# Altium PCB BluePhil.PcbDoc
Units mm, origin at the board's own origin, x right, y up, seen from the top; angles counter-clockwise.
Board outline 46.95 x 28.9 mm, 4 copper layers (Top Layer, Int1 (GND), Int2 (PWR), Bottom Layer), stack 1.369 mm thick; 51 components, 50 nets, 198 pads, 170 vias.
Unrouted connection lines stored in the file: 5.
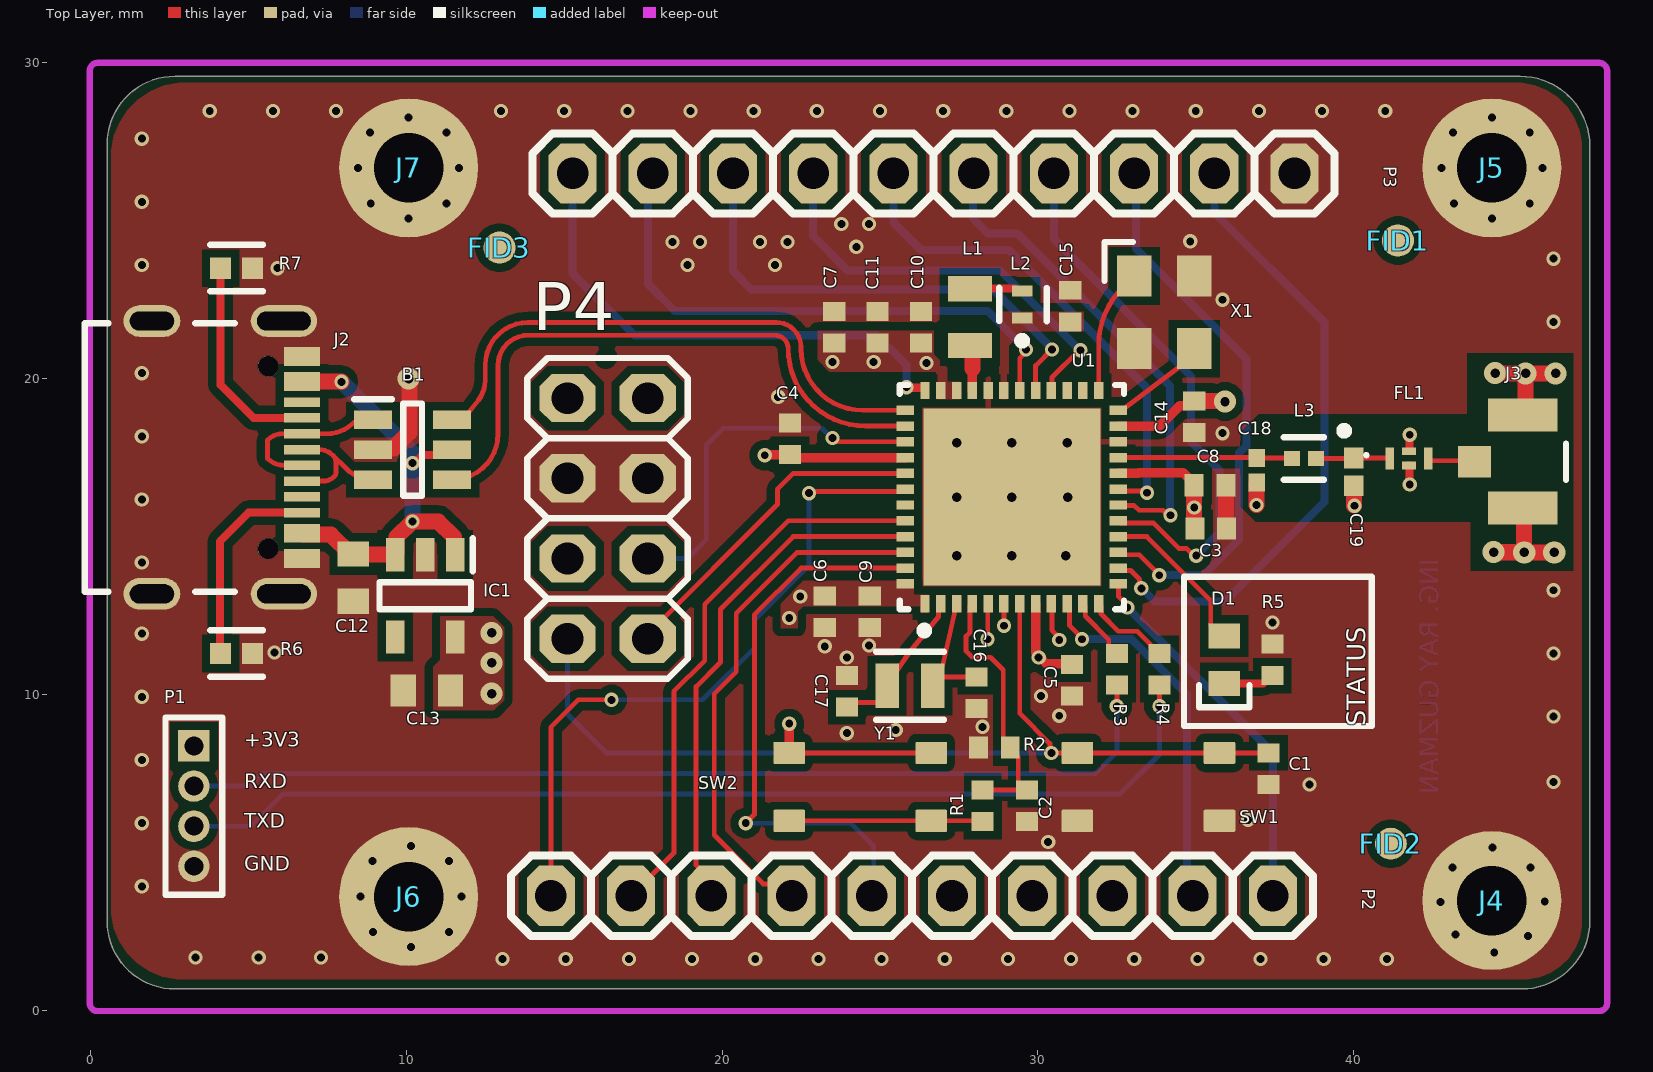
[diagram p0: Top Layer view]
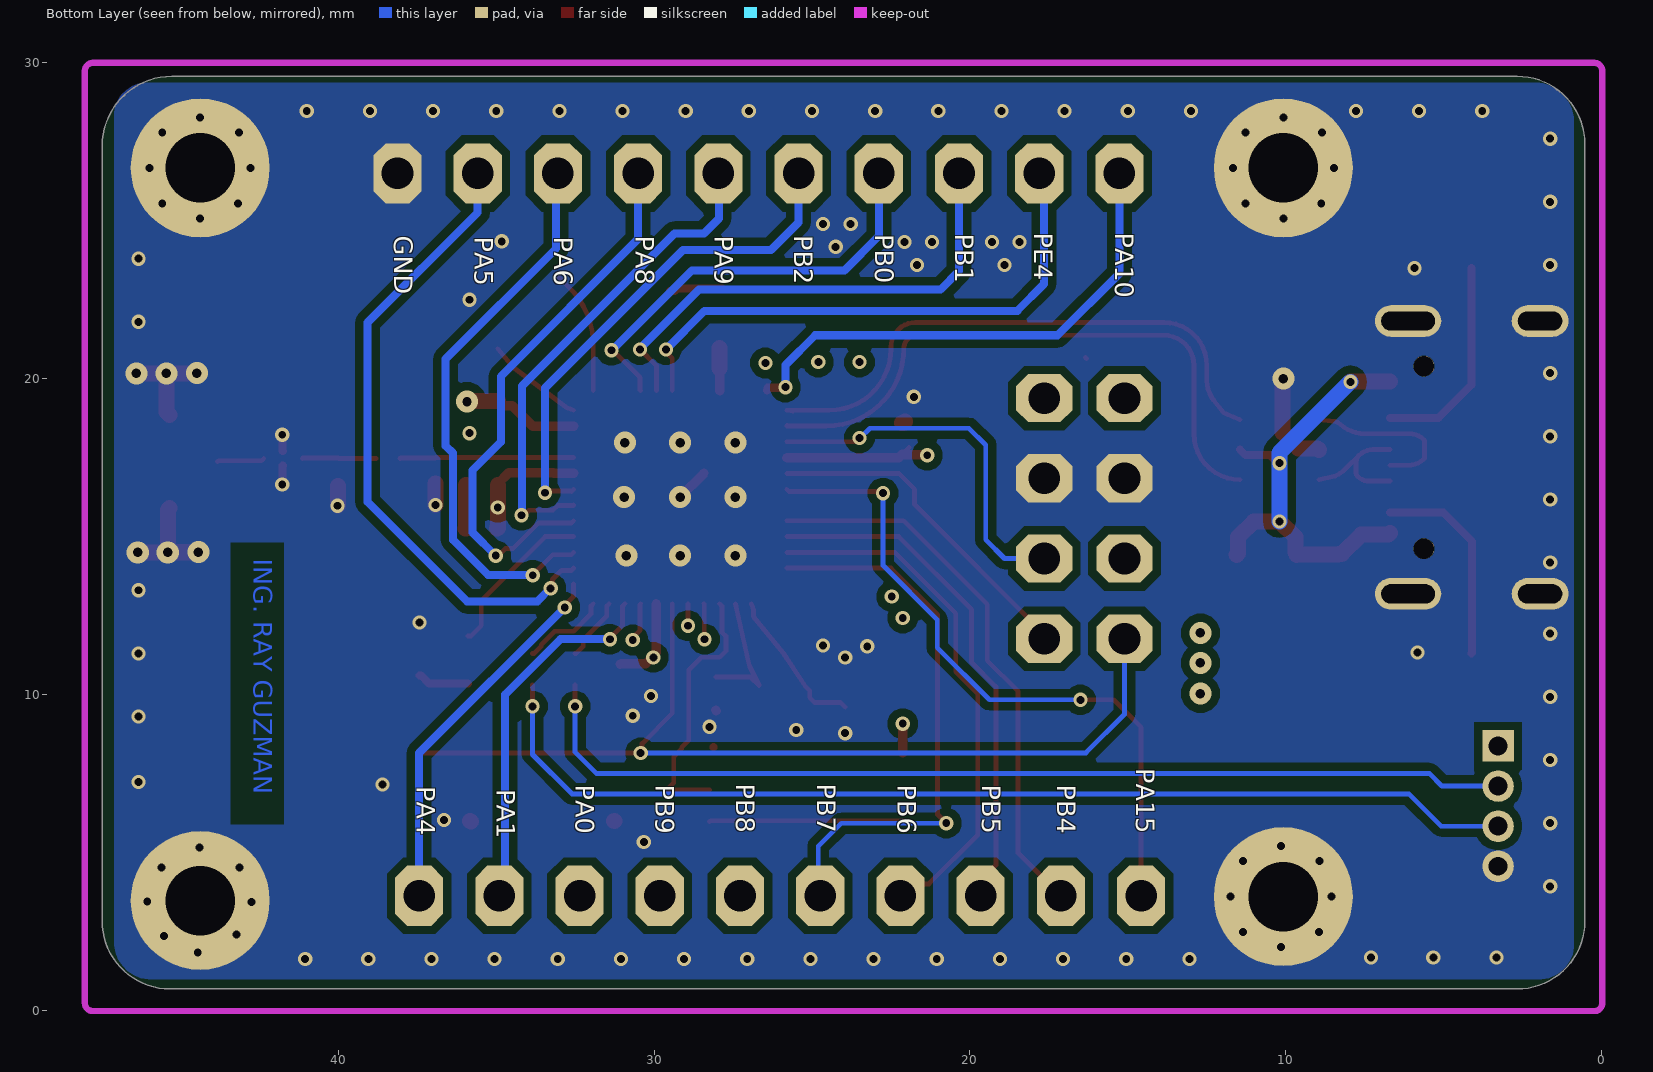
[diagram p1: Bottom Layer view, seen from below]
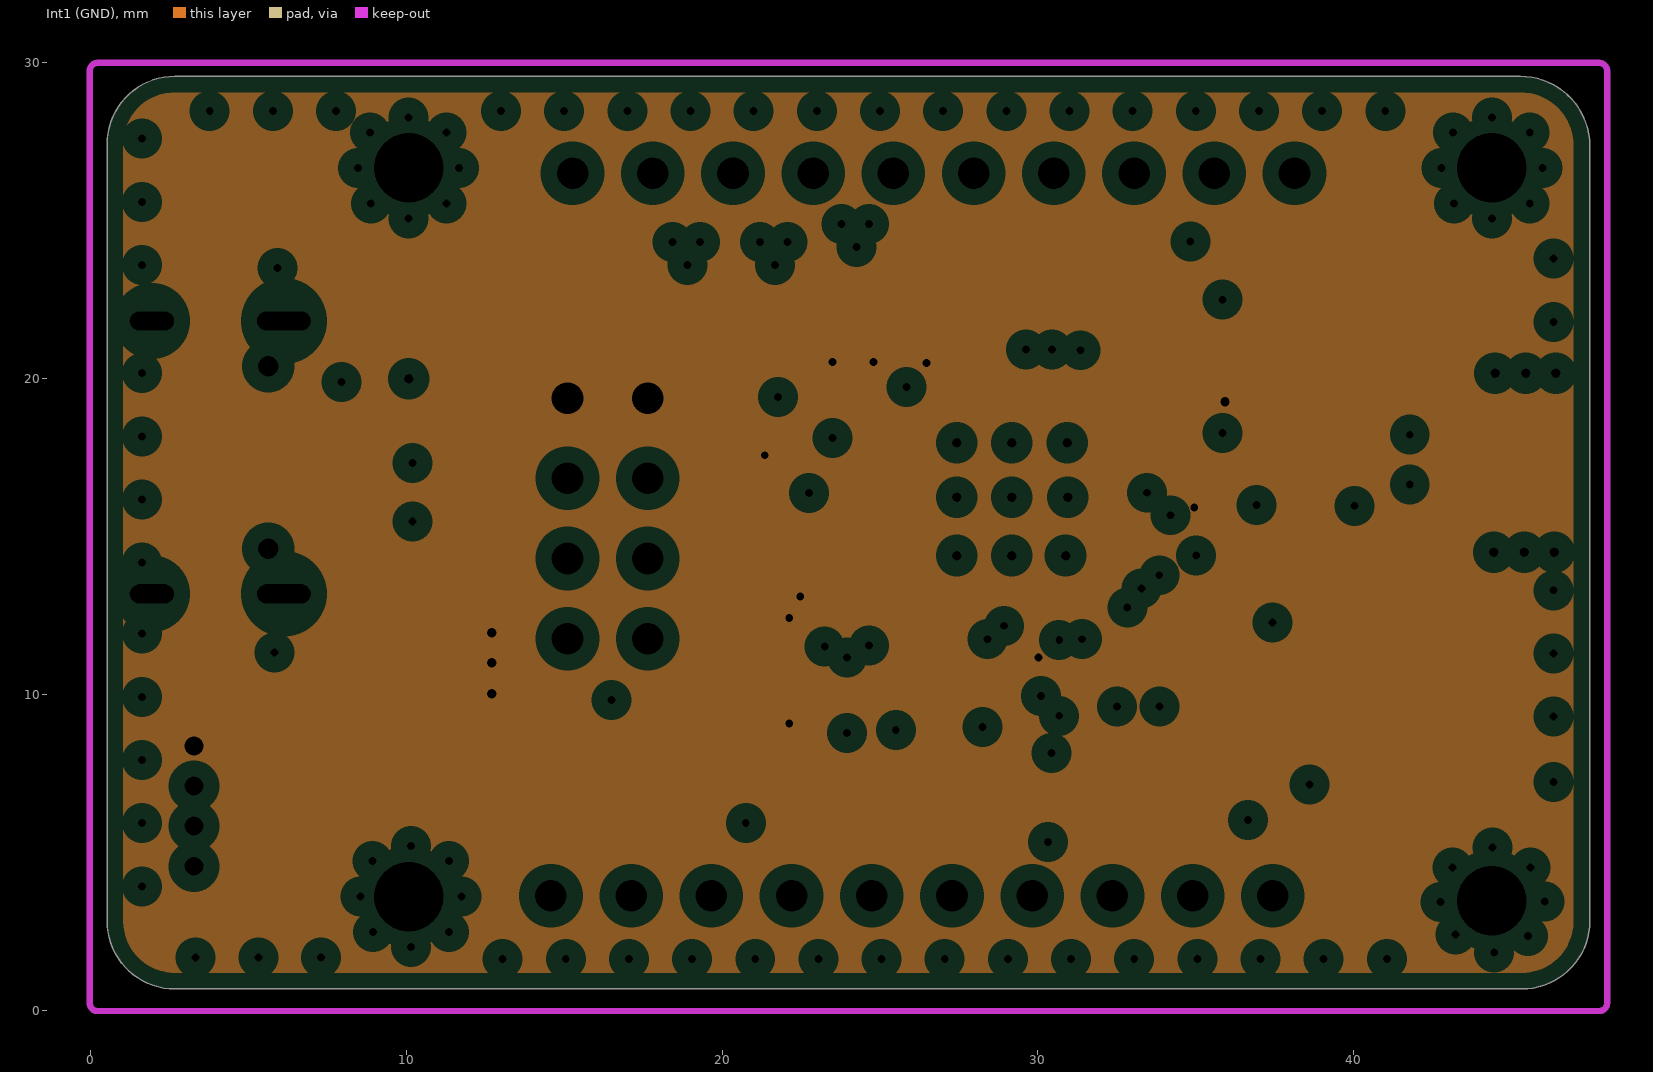
[diagram p2: Int1 (GND), clearances drawn from the general rule]
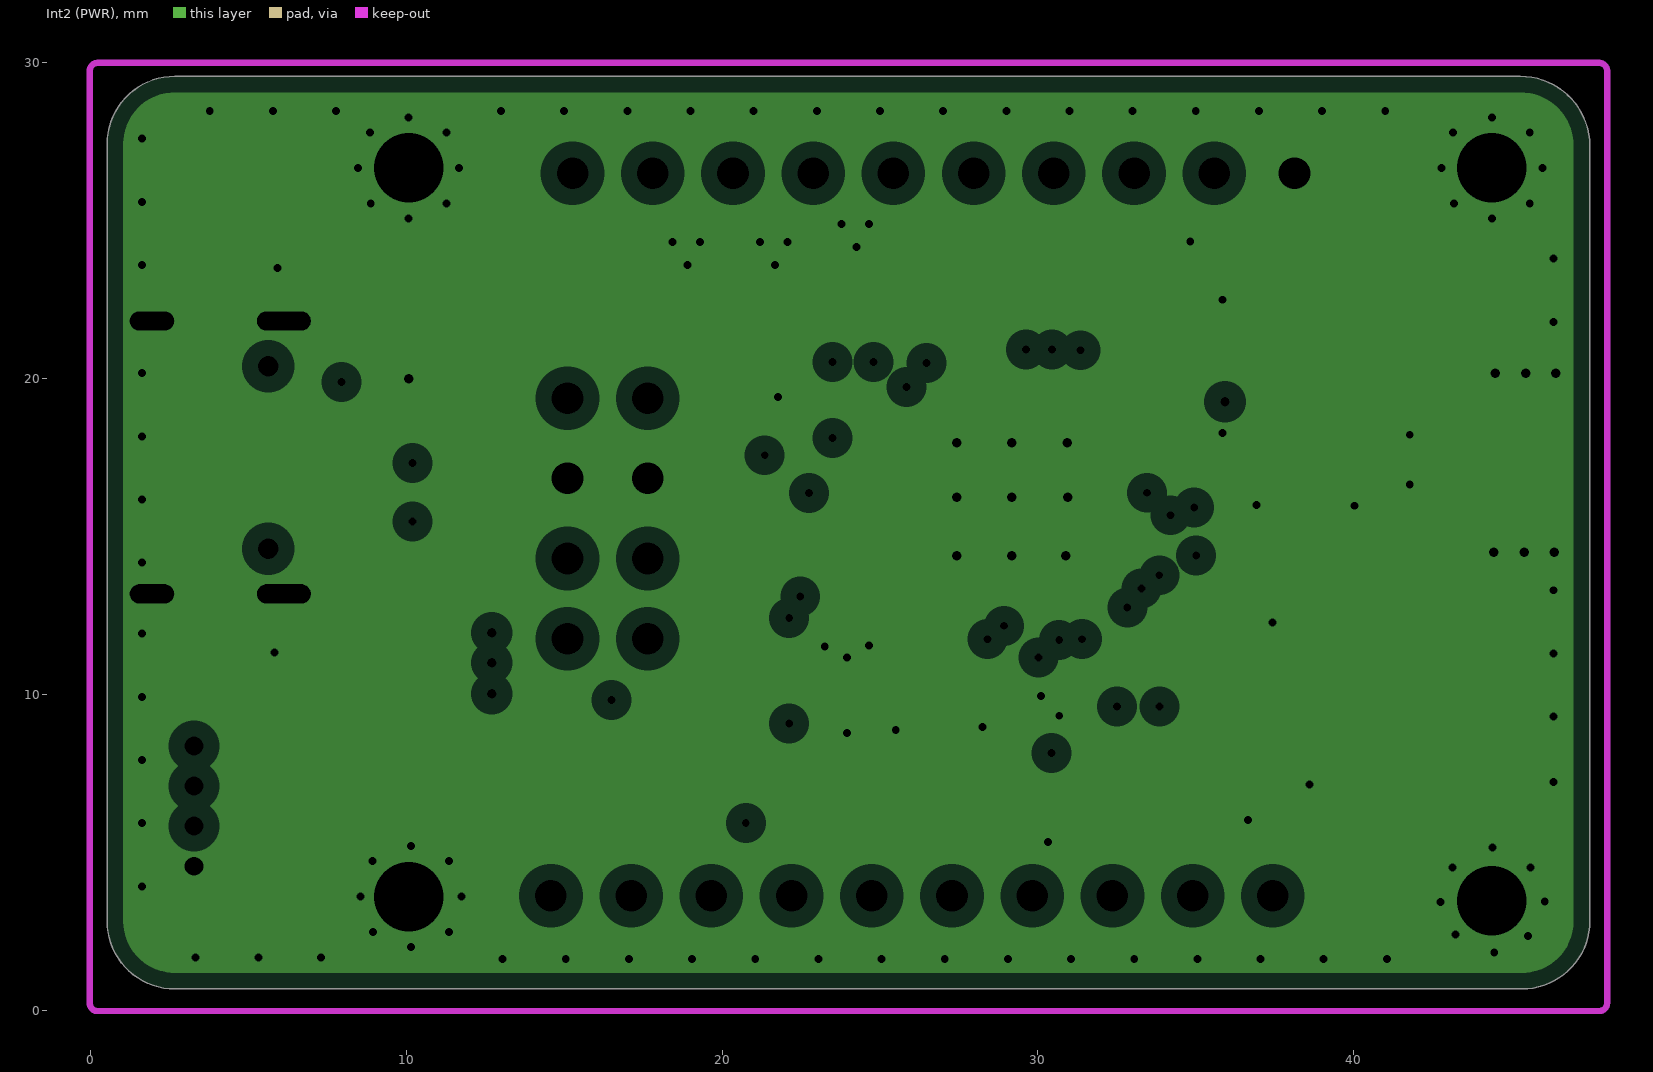
[diagram p3: Int2 (PWR), clearances drawn from the general rule]

## Layer stack, top to bottom
Top Solder: solder mask 0.0254, SM-001, Dk 4
Top Layer: signal copper 0.035
Dielectric 1: prepreg 0.1295, PP-017, Dk 4.3
Dielectric 2: prepreg 0.1295, PP-017, Dk 4.3
Int1 (GND): plane copper 0.035, net GND
Dielectric 3: core 0.7112, Core-039, Dk 4.8
Int2 (PWR): plane copper 0.035, net +3V3
Dielectric 4: prepreg 0.1295, PP-017, Dk 4.3
Dielectric 5: prepreg 0.1295, PP-017, Dk 4.3
Bottom Layer: signal copper 0.035
Bottom Solder: solder mask 0.0254, SM-001, Dk 4

## Board outline
0.525,2.825 0.525,27.425 cw(c2.675,27.425) 2.675,29.575 45.275,29.575 cw(c45.275,27.375) 47.475,27.375 47.475,2.825 cw(c45.325,2.825) 45.325,0.675 2.675,0.675 cw(c2.675,2.825)

## Design rules (kind name [scope] priority, off if disabled: settings)
Clearance Clearance_2 [OnMid vs OnMid] p1: gap=0.254 ignorepadtopadclearanceinfootprint=TRUE except(0: Arc-Hole Track-Hole SMDPad-Hole THPad-Hole Via-Hole Fill-Hole Poly-Hole Region-Hole Text-Hole)
Clearance [All] p2: gap=0.254 ignorepadtopadclearanceinfootprint=TRUE except(0: Arc-Hole Track-Hole SMDPad-Hole THPad-Hole Via-Hole Fill-Hole Poly-Hole Region-Hole Text-Hole; 0.15: Track-Track SMDPad-Via; 0.2: Track-SMDPad Track-Via SMDPad-Poly Via-Via)
Clearance Clearance_9_1 [(ExistsOnLayer('GND')) vs (ExistsOnLayer('GND'))] p3: gap=0.254 ignorepadtopadclearanceinfootprint=FALSE except(0: Arc-Hole Track-Hole SMDPad-Hole THPad-Hole Via-Hole Fill-Hole Poly-Hole Region-Hole Text-Hole)
Clearance Clearance_9_2 [(ExistsOnLayer('Top Layer') Or ExistsOnLayer('Bottom Layer')) vs (ExistsOnLayer('Top Layer') Or ExistsOnLayer('Bottom Layer'))] p4: gap=0.254 ignorepadtopadclearanceinfootprint=FALSE except(0: Arc-Hole Track-Hole SMDPad-Hole THPad-Hole Via-Hole Fill-Hole Poly-Hole Region-Hole Text-Hole; 0.2: Via-Via)
Clearance Clearance_1 [(ExistsOnLayer('GND')) vs (ExistsOnLayer('GND'))] p5: gap=0.254 ignorepadtopadclearanceinfootprint=FALSE except(0: Arc-Hole Track-Hole SMDPad-Hole THPad-Hole Via-Hole Fill-Hole Poly-Hole Region-Hole Text-Hole)
Clearance Clearance_3 [(ExistsOnLayer('Top Layer') Or ExistsOnLayer('Bottom Layer')) vs (ExistsOnLayer('Top Layer') Or ExistsOnLayer('Bottom Layer'))] p6: gap=0.254 ignorepadtopadclearanceinfootprint=FALSE except(0: Arc-Hole Track-Hole SMDPad-Hole THPad-Hole Via-Hole Fill-Hole Poly-Hole Region-Hole Text-Hole)
Clearance Clearance_4 [(ExistsOnLayer('GND')) vs (ExistsOnLayer('GND'))] p7: gap=0.254 ignorepadtopadclearanceinfootprint=FALSE except(0: Arc-Hole Track-Hole SMDPad-Hole THPad-Hole Via-Hole Fill-Hole Poly-Hole Region-Hole Text-Hole)
Clearance Clearance_5 [(ExistsOnLayer('Top Layer') Or ExistsOnLayer('Bottom Layer')) vs (ExistsOnLayer('Top Layer') Or ExistsOnLayer('Bottom Layer'))] p8: gap=0.254 ignorepadtopadclearanceinfootprint=FALSE except(0: Arc-Hole Track-Hole SMDPad-Hole THPad-Hole Via-Hole Fill-Hole Poly-Hole Region-Hole Text-Hole)
Clearance Clearance_6 [(ExistsOnLayer('GND')) vs (ExistsOnLayer('GND'))] p9: gap=0.254 ignorepadtopadclearanceinfootprint=FALSE except(0: Arc-Hole Track-Hole SMDPad-Hole THPad-Hole Via-Hole Fill-Hole Poly-Hole Region-Hole Text-Hole)
Clearance Clearance_7 [(ExistsOnLayer('Top Layer') Or ExistsOnLayer('Bottom Layer')) vs (ExistsOnLayer('Top Layer') Or ExistsOnLayer('Bottom Layer'))] p10: gap=0.254 ignorepadtopadclearanceinfootprint=FALSE except(0: Arc-Hole Track-Hole SMDPad-Hole THPad-Hole Via-Hole Fill-Hole Poly-Hole Region-Hole Text-Hole)
Clearance Clearance_8 [(ExistsOnLayer('GND')) vs (ExistsOnLayer('GND'))] p11: gap=0.254 ignorepadtopadclearanceinfootprint=FALSE except(0: Arc-Hole Track-Hole SMDPad-Hole THPad-Hole Via-Hole Fill-Hole Poly-Hole Region-Hole Text-Hole)
Clearance Clearance_9 [(ExistsOnLayer('Top Layer') Or ExistsOnLayer('Bottom Layer')) vs (ExistsOnLayer('Top Layer') Or ExistsOnLayer('Bottom Layer'))] p12: gap=0.254 ignorepadtopadclearanceinfootprint=FALSE except(0: Arc-Hole Track-Hole SMDPad-Hole THPad-Hole Via-Hole Fill-Hole Poly-Hole Region-Hole Text-Hole)
Clearance Clearance_10_1 [(ExistsOnLayer('GND')) vs (ExistsOnLayer('GND'))] p13: gap=0.254 ignorepadtopadclearanceinfootprint=FALSE except(0: Arc-Hole Track-Hole SMDPad-Hole THPad-Hole Via-Hole Fill-Hole Poly-Hole Region-Hole Text-Hole; 0.2: Via-Via)
Clearance Clearance_10_2 [(ExistsOnLayer('Top Layer') Or ExistsOnLayer('Bottom Layer')) vs (ExistsOnLayer('Top Layer') Or ExistsOnLayer('Bottom Layer'))] p14: gap=0.254 ignorepadtopadclearanceinfootprint=FALSE except(0: Arc-Hole Track-Hole SMDPad-Hole THPad-Hole Via-Hole Fill-Hole Poly-Hole Region-Hole Text-Hole; 0.2: Via-Via)
Clearance Clearance_10 [(ExistsOnLayer('GND')) vs (ExistsOnLayer('GND'))] p15: gap=0.254 ignorepadtopadclearanceinfootprint=FALSE except(0: Arc-Hole Track-Hole SMDPad-Hole THPad-Hole Via-Hole Fill-Hole Poly-Hole Region-Hole Text-Hole; 0.2: Via-Via)
Clearance Clearance_11 [(ExistsOnLayer('Top Layer') Or ExistsOnLayer('Bottom Layer')) vs (ExistsOnLayer('Top Layer') Or ExistsOnLayer('Bottom Layer'))] p16: gap=0.254 ignorepadtopadclearanceinfootprint=FALSE except(0: Arc-Hole Track-Hole SMDPad-Hole THPad-Hole Via-Hole Fill-Hole Poly-Hole Region-Hole Text-Hole; 0.2: Via-Via)
Clearance Clearance_12 [All] p17: gap=0.254 ignorepadtopadclearanceinfootprint=FALSE except(0: Arc-Hole Track-Hole SMDPad-Hole THPad-Hole Via-Hole Fill-Hole Poly-Hole Region-Hole Text-Hole)
Creepage Creepage_1 [All] p1: checkdistance=0.254 applytopolygonpour=TRUE
DiffPairsRouting [All] p1: maxlimit=0.254 minlimit=0.254 mostfreqgap=0.254 toplayer_minwidth=0.152 toplayer_maxwidth=254 toplayer_prefwidth=0.254 bottomlayer_minwidth=0.152 bottomlayer_maxwidth=254 bottomlayer_prefwidth=0.254 maxuncoupledlength=12.7
DiffPairsRouting DifferentialPairsRouting_1 [All] p2: maxlimit=0.15 minlimit=0.15 mostfreqgap=0.15 toplayer_minwidth=0.22 toplayer_maxwidth=0.22 toplayer_prefwidth=0.22 bottomlayer_minwidth=0.22 bottomlayer_maxwidth=0.22 bottomlayer_prefwidth=0.22 maxuncoupledlength=0.254
MinimumSolderMaskSliver [All] p1: minsoldermaskwidth=0.151
PlaneClearance [All] p1: clearance=0.508
PlaneConnect [All] p1: planeconnectstyle=Relief reliefexpansion=0.508 reliefentries=4 reliefconductorwidth=0.254 reliefairgap=0.254
PolygonConnect [All] p1: connectstyle=Direct reliefconductorwidth=0.254 reliefentries=4 polygonreliefangle="90 Angle" airgapwidth=0.254
RoutingVias [All] p1: holewidth=0.711 width=1.27 viastyle="Through Hole" minholewidth=0.711 minwidth=1.27 maxholewidth=0.711 maxwidth=1.27
RoutingVias RoutingViaStyle_1 [All] p2: holewidth=0.25 width=0.25 viastyle="Through Hole" minholewidth=0.2 minwidth=0.4 maxholewidth=0.5 maxwidth=0.1
SilkToSilkClearance [All] p1: silktosilkclearance=0.2
SolderMaskExpansion [All] p1: expansion=0.102 istentingtop=FALSE
UnRoutedNet BrokenNets_1 [All] p1: checkbadconnections=TRUE
Width [All] p1: maxlimit=1 minlimit=0.152 preferedwidth=0.254 minimp=50.000000 maximp=50.000000 favimp=50.000000
Width MaxMinWidth_1 [All] p2: maxlimit=1 minlimit=0.152 preferedwidth=0.254 minimp=50.000000 maximp=50.000000 favimp=50.000000
24 further rules are at their usual default settings.

## Classes and differential pairs
differential pair class USB: USB_D
net class USB: USB_D_N USB_D_P
differential pair USB_D: +USB_D_P -USB_D_N

## Components (designator, comment, footprint, x,y, rotation, side; value= is the part's Value field where it differs from the comment)
B1 "USBLC6-2SC6" SOT95P280X145-6N 10.2,17.75 r0 top locked
C1 "C0402_10V" CAP_0402 37.3,7.65 r270 top value=100nF
C2 "C0402_10V" CAP_0402 29.65,6.475 r270 top value=100nF
C3 "C0402_10V" CAP_0402 35.475,15.25 r0 top value=100nF
C4 "C0402_10V" CAP_0402 22.15,18.1 r90 top value=100nF
C5 "C0402_10V" CAP_0402 31.075,10.45 r270 top value=100nF
C6 "C0402_10V" CAP_0402 23.25,12.625 r270 top value=100nF
C7 "C0402_10V" CAP_0402 23.55,21.625 r90 top value=100nF
C8 "C0402_10V" CAP_0402 35.45,16.625 r0 top value=100nF
C9 "C0402_10V" CAP_0402 24.675,12.625 r270 top value=4.7uF
C10 "C0402_10V" CAP_0402 26.3,21.625 r90 top value=100nF
C11 "C0402_10V" CAP_0402 24.925,21.625 r90 top value=4.7uF
C12 "C0603_10V" CAP_0603 8.325,13.7 r90 top
C13 "C0603_10V" CAP_0603 10.65,10.125 r0 top
C14 "C0402_10V" CAP_0402 34.95,18.8 r270 top value=100nF
C15 "C0402_10V" CAP_0402 31.025,22.3 r90 top value=4.7uF
C16 "C0402_10V" CAP_0402 28.05,10.05 r90 top
C17 "C0402_10V" CAP_0402 23.95,10.1 r270 top
C18 "GRM1555C1HR80BA01D" CAPC1005X55X25LL05T10 36.925,17.1 r90 top
C19 "GRM1555C1HR30WA01D" CAPC1005X55X25NL05T10 40,17.05 r270 top
D1 "RED" LED_0603_RED 35.9,11.1 r90 top
FID1 "FID_1MM" FID_40X120D#1 41.4,24.125 r0 top locked
FID2 "FID_1MM" FID_40X120D#2 41.175,5.275 r90 top locked
FID3 "FID_1MM" FID_40X120D#2 12.95,24.15 r90 top
FL1 "DLF162500LT-5028A1" DLF162500LT5028A1 41.75,17.477 r0 top
IC1 "MIC5365-3.3YD5-TR" SOT95P280X100-5N 10.6,13.125 r270 top
J2 "USB4105-GF-A-060" USB4105-GF-A-060 4.322,17.506 r270 top locked
J3 "U.FL-R-SMT(10)" FP-U_FL-R-SMT_10-MFG 45.35,17.375 r90 top
J4 "4mmx1.5mm" PAD_WITH_HOLE_4mmx1.5mm#1 44.15,3.775 r0 top
J5 "4mmx1.5mm" PAD_WITH_HOLE_4mmx1.5mm#2 44.475,26.675 r0 top
J6 "4mmx1.5mm" PAD_WITH_HOLE_4mmx1.5mm#3 10.15,3.8 r0 top
J7 "4mmx1.5mm" PAD_WITH_HOLE_4mmx1.5mm#4 10.075,26.675 r0 top locked
L1 "74479774222" WE-PMI_0805_L2W1.2H0.5 27.85,21.95 r270 top
L2 "LQG15WZ10NJ02D" FP-LQG15WH_02-MFG 29.5,22.35 r90 top
L3 "LQG15HS2N7S02D" FP-LQG15HH_02-IPC_C 38.425,17.475 r180 top
P1 "MHDR1X4" MHDR1X4body 3.275,8.37 r270 top locked
P2 "Header 10" MY_MA10-1 26.01,3.625 r0 top
P3 "Header 10" MY_MA10-1 26.695,26.5 r0 top
P4 "Header 4X2" My_2X4 16.375,15.575 r90 top
R1 "220R" RES_0402 28.25,6.475 r270 top
R2 "5k1" RES_0402 28.625,8.325 r180 top
R3 "220R" RES_0402 32.5,10.8 r90 top
R4 "220R" RES_0402 33.85,10.8 r90 top
R5 "R0402" RES_0402 37.425,11.1 r270 top
R6 "ERJ-2RKF5101X" FP-ERJ2RK-IPC_A 4.625,11.3 r180 top locked
R7 "ERJ-2RKF5101X" FP-ERJ2RK-IPC_A 4.625,23.5 r180 top locked
SW1 "Tactile Switch" PTS815 33.5,7.075 r180 top
SW2 "Tactile Switch" PTS815 24.375,7.075 r180 top
U1 "STM32WB55CEU6" FP-UFQFPN48-A0B9-MFG 29.175,16.25 r90 top
X1 "24MHz" XTAL_3225 34,22.1 r270 top
Y1 "ABS06-107-32.768KHZ-T" FP-ABS06-MFG 25.95,10.275 r180 top

## Footprints (in the part's own frame and the unit in brackets; to place one, negate y for a bottom-side part, rotate by r counter-clockwise, add the part's x,y. Pads: shape width x height; smd on the part's side, far side on the other; paste and mask are expansions set on the pad)
CAP_0402 [mm]
  rect 0.6x0.7 smd: 1(-0.5,0) 2(0.5,0)
  body extent -0.5,-0.26 0.5,0.26, height 0.37
CAP_0603 [mm]
  rect 0.8x1 smd: 1(-0.75,0) 2(0.75,0)
  body extent -0.8,-0.4 0.8,0.4, height 0.51
CAPC1005X55X25LL05T10 [mm] "Chip Capacitor, 2-Leads, Body 1.00x0.50mm, IPC High Density"
  rect 0.56x0.52 smd: 1(-0.39,0) 2(0.39,0)
  body extent -0.53,-0.28 0.53,0.28, height 0.55
CAPC1005X55X25NL05T10 [mm] "Chip Capacitor, 2-Leads, Body 1.00x0.50mm, IPC Medium Density"
  rect 0.66x0.62 smd: 1(-0.44,0) 2(0.44,0)
  body extent -0.53,-0.28 0.53,0.27, height 0.55
DLF162500LT5028A1 [mm]
  rect 0.275x0.7 smd: 1(-0.612,0) 3(0.613,0)
  rect 0.45x0.245 smd: 2(0,-0.227) 4(0,0.227)
  silkscreen extent -1.4,0.05 -1.3,0.15, body extent -0.83,-0.42 0.83,0.42, height 0.26
FID_40X120D#1 [mil]
  round 40 smd paste-19.68 mask+0: 1(0,9.84)
FID_40X120D#2 [mil]
  round 40 smd paste-19.68 mask+0: 1(0,0)
FP-ABS06-MFG [mm]
  rect 0.75x1.4 smd paste+0 mask+0: 1(-0.725,0) 2(0.725,0)
  silkscreen extent -1.07,-1.07 1.07,1.07, body extent -1.2,-0.8 1.2,0.8, height 0.25
FP-ERJ2RK-IPC_A [mm]
  rect 0.668x0.672 smd paste+0 mask+0: 1(-0.502,0) 2(0.502,0)
  silkscreen extent -0.84,-0.74 0.84,0.74, body extent -1.04,-0.54 1.04,0.54, height 0.25
FP-LQG15HH_02-IPC_C [mm]
  rect 0.515x0.472 smd paste+0 mask+0: 1(-0.379,0) 2(0.379,0)
  silkscreen extent -1.4,-1 0.64,0.67, body extent -0.74,-0.38 0.74,0.38, height 0.25
FP-LQG15WH_02-MFG [mm]
  rect 0.35x0.65 smd paste+0 mask+0: 1(-0.425,0) 2(0.425,0)
  silkscreen extent -1.27,-0.78 0.53,0.73, body extent -0.7,-0.43 0.7,0.43, height 0.25
FP-U_FL-R-SMT_10-MFG [mm]
  rect 1x1.05 smd paste-1000 mask+0: 1(0,1.525)
  rect 1.05x2.2 smd paste-1000 mask+0: 2(-1.475,0) 3(1.475,0)
  silkscreen extent -0.58,-1.38 0.58,-1.38, body extent -2.1,-1.48 2.1,2.15, height 0.25
FP-UFQFPN48-A0B9-MFG [mm]
  rect 0.55x0.3 smd paste+0 mask+0: 1(-3.375,2.75) 2(-3.375,2.25) 3(-3.375,1.75) 4(-3.375,1.25) 5(-3.375,0.75) 6(-3.375,0.25) 7(-3.375,-0.25) 8(-3.375,-0.75) 9(-3.375,-1.25) 10(-3.375,-1.75) 11(-3.375,-2.25) 12(-3.375,-2.75) 25(3.375,-2.75) 26(3.375,-2.25) 27(3.375,-1.75) 28(3.375,-1.25) 29(3.375,-0.75) 30(3.375,-0.25) 31(3.375,0.25) 32(3.375,0.75) 33(3.375,1.25) 34(3.375,1.75) 35(3.375,2.25) 36(3.375,2.75)
  rect 0.3x0.55 smd paste+0 mask+0: 13(-2.75,-3.375) 14(-2.25,-3.375) 15(-1.75,-3.375) 16(-1.25,-3.375) 17(-0.75,-3.375) 18(-0.25,-3.375) 19(0.25,-3.375) 20(0.75,-3.375) 21(1.25,-3.375) 22(1.75,-3.375) 23(2.25,-3.375) 24(2.75,-3.375) 37(2.75,3.375) 38(2.25,3.375) 39(1.75,3.375) 40(1.25,3.375) 41(0.75,3.375) 42(0.25,3.375) 43(-0.25,3.375) 44(-0.75,3.375) 45(-1.25,3.375) 46(-1.75,3.375) 47(-2.25,3.375) 48(-2.75,3.375)
  rect 5.6x5.6 smd paste+0 mask+0: 49(0,0)
  silkscreen extent -4.35,-3.55 3.55,3.55, body extent -3.75,-3.75 3.75,3.75, height 0.25
LED_0603_RED [mm]
  rect 0.8x1 smd: A(0.75,0) K(-0.75,0)
  silkscreen extent -1.5,-0.8 -0.8,0.8, body extent -0.8,-0.4 0.8,0.4, height 0.6
MHDR1X4body [mm]
  rect 1x1 hole 0.6: 1(0,0)
  round 1 hole 0.6: 2(1.27,0) 3(2.54,0) 4(3.81,0)
  silkscreen extent -0.9,-0.9 4.71,0.9, body extent -0.66,-1.22 4.42,1.28, height 4.61
My_2X4 [mil]
  oct 60x70 hole 39.37: 1(-150,-50) 2(-150,50) 3(-50,-50) 4(-50,50) 5(50,-50) 6(50,50) 7(150,-50) 8(150,50)
  silkscreen extent -200,-100 200,100, body extent -200,-100 200,100, height 336
MY_MA10-1 [mm]
  oct 1.524x1.905 hole 1: 1(-11.43,0) 2(-8.89,0) 3(-6.35,0) 4(-3.81,0) 5(-1.27,0) 6(1.27,0) 7(3.81,0) 8(6.35,0) 9(8.89,0) 10(11.43,0)
  silkscreen extent -12.7,-1.27 12.7,1.27, body extent -12.6,-1.25 12.8,1.25, height 8.23
PAD_WITH_HOLE_4mmx1.5mm#1 [mm]
  round 4.4 hole 2.2 paste-2539.97 mask+0: 1(0.225,-0.3)
PAD_WITH_HOLE_4mmx1.5mm#2 [mm]
  round 4.4 hole 2.2 paste-2539.97 mask+0: 1(-0.1,0)
PAD_WITH_HOLE_4mmx1.5mm#3 [mm]
  round 4.4 hole 2.2 paste-2539.97 mask+0: 1(-0.075,-0.2)
PAD_WITH_HOLE_4mmx1.5mm#4 [mm]
  round 4.4 hole 2.2 paste-2539.97 mask+0: 1(0,0)
PTS815 [mm]
  rrect10% 1x0.7 smd mask+0: 1(-2.25,1.075) 1(2.25,1.075) 2(-2.25,-1.075) 2(2.25,-1.075)
  body extent -2.25,-1.6 2.25,1.6, height 2.5
RES_0402 [mm]
  rect 0.6x0.7 smd: 1(-0.5,0) 2(0.5,0)
  body extent -0.5,-0.25 0.5,0.25, height 0.3
SOT95P280X100-5N [mm]
  rect 1.05x0.6 smd: 1(-1.3,0.95) 2(-1.3,0) 3(-1.3,-0.95) 4(1.3,-0.95) 5(1.3,0.95)
  silkscreen extent -1.83,-1.45 0.43,1.5, body extent -1.4,-1.45 1.4,1.45, height 1
SOT95P280X145-6N [mm]
  rect 1.2x0.6 smd: 1(-1.25,0.95) 2(-1.25,0) 3(-1.25,-0.95) 4(1.25,-0.95) 5(1.25,0) 6(1.25,0.95)
  silkscreen extent -1.85,-1.46 0.3,1.6
USB4105-GF-A-060 [mm]
  rect 0.6x1.15 smd mask+0.05: A1B12(-3.2,2.378) A4B9(-2.4,2.378) B1A12(3.2,2.378) B4A9(2.4,2.378)
  rect 0.3x1.15 smd mask+0.05: A5(-1.25,2.378) A6(-0.25,2.378) A7(0.25,2.378) A8(1.25,2.378) B5(1.75,2.378) B6(0.75,2.378) B7(-0.75,2.378) B8(-1.75,2.378)
  round 0.65 hole 0.65 unplated mask+0.05: MH(-2.89,1.303) MH(2.89,1.303)
  oval 1x2.1 hole 0.6 slot 1.7 at 90 deg: SH(-4.32,1.803) SH(4.32,1.803)
  oval 1x1.8 hole 0.6 slot 1.4 at 90 deg: SH(-4.32,-2.377) SH(4.32,-2.377)
  silkscreen extent -4.25,-4.5 4.25,0.25, body extent -4.47,-4.97 4.47,2.73, height 3.27
WE-PMI_0805_L2W1.2H0.5 [mm] "Power Multilayer Inductor, body 2x1.25mm"
  rect 0.8x1.4 smd: 1(-0.9,0) 2(0.9,0)
  body extent -1,-0.62 1,0.63, height 0.5
XTAL_3225 [mm]
  rect 1.3x1.1 smd: 1(-1.15,-0.95) 2(1.15,-0.95) 3(1.15,0.95) 4(-1.15,0.95)
  silkscreen extent -2.23,-1.89 -1,-1, body extent -1.6,-1.28 1.6,1.23, height 0.61

## Part data
B1: "TVS Diode Array Uni-Directional USBLC6-2SC6 17V, SOT-23 6-Pin", Manufacturer_Name=STMicroelectronics, Mouser Part Number=511-USBLC6-2SC6, Datasheet Link=http://www.st.com/st-web-ui/static/active/en/resource/technical/document/datasheet/CD00050750.pdf, Geometry.Height=1.45mm, Manufacturer_Part_Number=USBLC6-2SC6, Mouser Price/Stock=https://www.mouser.co.uk/ProductDetail/STMicroelectronics/USBLC6-2SC6?qs=po45yt2pPpu%2FhNIlwQdTlg%3D%3D
C1 C2 C3 C4 C5 C6 C7 C8 C9 C10 C11 C14 C15 C16 C17: library part CAP_0402_10V, "Capacitor SMD 0402 10V"
C12 C13: library part CAP_0603_10V, "Capacitor SMD 0603 10V"
C18: library part CMP-1034-00043-2, Manufacturer=Murata, Part Number=GRM1555C1HR80BA01D
C19: library part CMP-1034-00007-2, Manufacturer=Murata, Part Number=GRM1555C1HR30WA01D
D1: library part LED_0603_RED, "LED 0603 RED SMD"
FL1: "Filter", Manufacturer_Name=TDK, Mouser Part Number=810-DLF16250LT5028A1, Arrow Part Number=DLF162500LT-5028A1, Arrow Price/Stock=https://www.arrow.com/en/products/dlf162500lt-5028a1/tdk?region=europe, Datasheet Link=https://product.tdk.com/system/files/dam/doc/product/rf/rf/filter/catalog/rf_lpf_dlf162500lt-5028a1_en.pdf, Height=0.4mm, Manufacturer_Part_Number=DLF162500LT-5028A1, Mouser Price/Stock=https://www.mouser.co.uk/ProductDetail/TDK/DLF162500LT-5028A1?qs=U%2FZX79kHR%2FlwIbAISCs3qA%3D%3D
IC1: "Integrated Circuit", Manufacturer_Name=Microchip, Mouser Part Number=998-MIC5365-3.3YD5TR, Arrow Part Number=MIC5365-3.3YD5-TR, Arrow Price/Stock=https://www.arrow.com/en/products/mic5365-3.3yd5-tr/microchip-technology?region=nac, Datasheet Link=https://ww1.microchip.com/downloads/en/DeviceDoc/mic5365.pdf, Height=1mm, Manufacturer_Part_Number=MIC5365-3.3YD5-TR, Mouser Price/Stock=https://www.mouser.co.uk/ProductDetail/Microchip-Technology/MIC5365-3.3YD5-TR?qs=U6T8BxXiZAXzRinbbfZRrg%3D%3D
J2: "USB Connector Type C SMT 12 Pin", Manufacturer=GCT, Manufacturer Part Number=USB4105-GF-A-060
J3: library part CMP-0029-00003-2, "CONN U.FL RCPT STR 50 OHM SMD", Case/Package=SMD/SMT, Dielectric Material=Polymer, Frequency=6GHz, Housing Color=Beige, Max Operating Temperature=90°C, Min Operating Temperature=-40°C, Package Quantity=1, Body Material=Bronze, Body Plating=Silver, Connector Type=Coaxial, Contact Material=Brass, Contact Plating=Gold, Depth=3.1mm, Fastening Type=Snap, Impedance=50R, Lead Free="Lead Free", Length=3mm, Max Frequency=6GHz, Mount="Surface Mount", Orientation=Vertical, Packaging="Tape and Reel", Plating=Silver, Radiation Hardening=No, Termination=Solder
J4 J5 J6 J7: library part PAD_WITH_HOLE_4mmx1.5mm
L1: library part CMP-1392-00044-3, Ambient Temperature Range High=85°C, Ambient Temperature Range Low=-40°C, Case/Package=0805, Current Rating=700mA, DC Resistance (DCR)=340mΩ, Inductance=2.2µH, Inductance Tolerance=20%, Max Operating Temperature=125°C, Saturation Current=250mA, Self Resonant Frequency=40MHz, Series Resistance=425mΩ, Test Frequency=1MHz, Height=500µm, Length=2mm, Min Operating Temperature=-40°C, NexarPartId=23392509, Number of Pins=2, Packaging=Digi-Reel®, Q Factor=15, RMS Current (Irms)=700mA, RoHS=Compliant, Tolerance=20%, Width=1.25mm
L2: library part CMP-06042-005237-1, "Multilayer type Inductor for Automotive 10nH ±5% 0.19Ω 500mA 0402", Case Code (Imperial)=0402, Case Code (Metric)=1005, Current Rating=500mA, DC Resistance (DCR)=190mR, Inductance=10nH, Max Operating Temperature=125°C, Min Operating Temperature=-55°C, Ratings=AEC-Q200, Self Resonant Frequency=3.3GHz, Test Frequency=100MHz, Tolerance=5%, Case/Package=0402, Core Material=Air, Mount="Surface Mount", Packaging="Cut Tape", Shielding=Unshielded
L3: library part CMP-2000-06580-2, "Multilayer type RF Inductor 2.7nH ±0.3nH 0.12Ω 800mA 0402", Case Code (Imperial)=0402, Case Code (Metric)=1005, Current Rating=300mA, DC Resistance (DCR)=150mR, Inductance=2.7nH, Max Operating Temperature=125°C, Min Operating Temperature=-55°C, Package Quantity=10000, Self Resonant Frequency=6GHz, Test Frequency=100MHz, Case/Package=0402, Core Material=Air, DC Current=300mA, Depth=0.55mm, Height=0.5mm, Height - Seated (Max)=0.022inch, Lead Free="Lead Free", Length=1mm, Max DC Current=300mA, Military Standard=Not, Mount="Surface Mount", Packaging="Tape and Reel", Q Factor=8, Radiation Hardening=No, Shielding=Unshielded, Termination=SMD/SMT, Width=0.5mm
P1: "Header, 4-Pin", LatestRevisionDate=17-Jul-2002, LatestRevisionNote="Re-released for DXP Platform.", Publisher="Altium Limited"
P2 P3: "Header, 10-Pin", ASiD Part Number="Header 10-AS"
P4: "Header, 8-Pin, Dual row", ASiD Part Number="Header 4X2-AS"
R1 R2 R3 R4 R5: library part RES_0402, "Resistor SMD 0402"
R6 R7: library part CMP-2002-01158-2, "RES SMD 5.1K OHM 1% 1/10W 0402", Case Code (Imperial)=0402, Case Code (Metric)=1005, Max Operating Temperature=155°C, Max Power Dissipation=100mW, Min Operating Temperature=-55°C, Package Quantity=10000, Resistance=5.1kR, Resistance Tolerance=1%, Resistor Type="Thick Film", Temperature Coefficient=100ppm/°C, Voltage Rating=50V, Case/Package=0402, Construction=Rectangular, Contact Plating=Tin, Depth=0.5mm, Height=0.35mm, Lead Free="Lead Free", Length=1mm, Military Standard=Not, Mount="Surface Mount", Number of Terminations=2, Packaging="Tape and Reel", Power Rating=100mW, REACH SVHC="No SVHC", RoHS Compliant=Yes, Series=ERJ, Technology="THICK FILM", Termination=SMD/SMT, Tolerance=1%, Voltage Rating (DC)=50V, Weight=2.8E-05oz, Width=0.5mm
SW1 SW2: library part PTS815-SJM-250-SMTR-LFS, "Tactile Switches Tact Switch, 12 VDC, 50 mA, 4.2x3.2, 2.5mm H, 180gf, J leadspp SPST", Manufacturer="C&K Switches", Manufacturer Part Number="PTS815 SJM 250 SMTR LFS"
U1: library part CMP-12160-000002-1, "ULTRA-LOW-POWER DUAL CORE ARM CO", Ambient Temperature Range High=+105°C, Ambient Temperature Range Low=-40°C, Manufacturer=STMicroelectronics, Max Frequency=2480MHz, Max Junction Temp=+125°C, Max Power Dissipation=392mW, Max Supply Voltage=3.6V, Min Supply Voltage=1.71V, Package=UFQFPN48-A0B9, Temperature="-40°C to +125°C", Automotive=No, Bandwidth=2402-2480MHz, Category=IC, ComponentLink2Description=Datasheet, ComponentLink2URL=https://www.st.com/resource/en/datasheet/stm32wb55rg.pdf, Data Rate=2Mbits/s, Device Class L1="Integrated Circuits (ICs)", Device Class L2="RF Semiconductors and Devices", Device Class L3=Transceivers, Digikey Description="ULTRA-LOW-POWER DUAL CORE ARM CO", Height=0.65mm, Interface=I2C,SPI,UART,USART,USB,Other, Ipc Land Pattern Name=QFN50P700X700X57-48, Lead Free=Yes, Manufacturer Part Number=STM32WB55CEU6, Number of ADC Channels=13, Number Of Gpio=30, Octopart=https://octopart.com/stm32wb55ceu6-stmicroelectronics-96611730, RoHS=TRUE, Sensitivity=-100dBm, Standoff Height=0mm, Temperature Range High=+125°C, Temperature Range Low=-40°C
X1: library part TSX-3225_24.0000MF15X-AC, "Crystal SMD 24MHz 10PPM 7pF 3225", Manufacturer=Epson, Manufacturer Part Number="TSX-3225 24.0000MF15X-AC"
Y1: library part CMP-2000-05734-3, "Crystal 32.768kHz ±20ppm (Tol) 4pF FUND 60kΩ 2-Pin Mini-CSMD T/R", Case Code (Imperial)=0805, Case Code (Metric)=2012, Case/Package=SMD/SMT, ESR (Equivalent Series Resistance)=60kR, Frequency=32.768kHz, Frequency Stability=175ppm, Frequency Tolerance=20ppm, Load Capacitance=4pF, Max Operating Temperature=85°C, Min Operating Temperature=-40°C, Package Quantity=3000, Series Resistance=80kR, Height=0.6mm, Lead Free="Lead Free", Length=2mm, Mount="Surface Mount", Number of Pins=2, Packaging="Tape and Reel", Radiation Hardening=No, RoHS Compliant=Yes, Series=ABS06, Termination=SMD/SMT, Tolerance=20ppm, Width=1.2mm

## Via types
v1: diameter 0.45/0.45 (per signal layer), hole 0.25, Top Layer to Bottom Layer, tented both sides, 84 vias
v2: diameter 0.45, hole 0.25, Top Layer to Bottom Layer, 27 vias
v3: diameter 0.45/0.45 (per signal layer), hole 0.25, Top Layer to Bottom Layer, 27 vias
v4: diameter 0.7/0.7 (per signal layer), hole 0.3, Top Layer to Bottom Layer, tented both sides, 20 vias
v5: diameter 0.45, hole 0.25, Top Layer to Bottom Layer, tented both sides, 12 vias

## Nets (pads, with @x,y where several pads share a name; then routed paths per layer and width w, separated by ;. In a path a pad name is that pad's centre, name@x,y a point inside that pad or via, vN(x,y) a via of type N, cw(c..) or ccw(c..) an arc to the next point about the centre after c; other vN are vias at no path point)
+3V3: C3.1 C4.1 C5.1 C6.1 C7.1 C8.1 C9.1 C10.1 C11.1 C13.2 C14.1 IC1.5 P1.1 P4.7 P4.8 SW2.2 U1.1 U1.8 U1.20 U1.23 U1.34 U1.35 U1.40 U1.48 | length 20.9
  Top Layer w0.152: 16.311,20.636 16.35,20.675 ; C4.1@21.926,17.824 C4.1 ; SW2.2@22.125,8.15 SW2.2@26.625,8.15
  Top Layer w0.3: v1(21.35,17.575) 21.362,17.587 22.137,17.587 C4.1 22.25,17.5 U1.40 ; SW2.2@22.125,8.15 v1(22.125,9.075) ; U1.8 29.925,11.316 30.025,11.216 v1(30.025,11.175) 30.066,11.175 30.266,10.975 31.05,10.975 C5.1 ; U1.20 33.173,17 33.19,17.017 34.608,17.017 34.95,16.675 C8.1 ; U1.23 33.85,18.5 34.5,19.15 34.8,19.15 C14.1
  Top Layer w0.508: C8.1 v1(34.95,15.925) 34.95,15.275 C3.1 ; C14.1 34.962,19.287 35.912,19.287 v4(35.925,19.275)
  other v1: 22.125,12.425 22.475,13.1 26.475,20.5 23.5,20.525 24.8,20.525
  other v4: 12.7,10.025 12.7,11 12.7,11.95
+5V: B1.5 C12.2 IC1.1 IC1.3 J2.A4B9 J2.B4A9 | length 14.6
  Top Layer w0.254: v5(10.2,17.325) 10.253,17.325 10.505,17.577 11.277,17.577 B1.5
  Top Layer w0.508: J2.B4A9 6.745,15.06 7.615,15.06 8.225,14.45 C12.2 8.338,14.437 IC1.3@9.637,14.437 ; J2.A4B9 7.95,19.906 v1(7.95,19.9) ; IC1.3 IC1.3@9.637,14.437 ; IC1.1 11.504,14.471 11.504,14.988 11.017,15.475 10.183,15.475 9.696,14.988 9.696,14.496 IC1.3@9.637,14.437
  Bottom Layer w0.508: v1(7.95,19.9) 10.2,17.65 v5(10.2,15.475)
BOOT0: C2.1 R1.1 R2.1 U1.4 | length 8.5
  Top Layer w0.152: U1.4 27.851,12.801 27.851,11.976 27.725,11.85 27.725,11.375 27.924,11.176 28.499,11.176 28.9,10.775 28.9,8.688 28.901,8.687 28.901,8.549 R2.1 29.125,8.275 29.376,8.024 29.376,7.199 29.6,6.975 C2.1 R1.1
GND: B1.2 C1.2 C2.2 C3.2 C4.2 C5.2 C6.2 C7.2 C8.2 C9.2 C10.2 C11.2 C12.1 C13.1 C14.2 C15.2 C16.1 C17.1 C18.1 C19.2 FL1.2 FL1.4 IC1.2 J2.A1B12 J2.B1A12 J2.SH J3.2 J3.3 J4.1 J5.1 J6.1 J7.1 P1.4 P3.10 P4.5 P4.6 R2.2 R5.1 R6.1 R7.1 SW1.1 U1.22 U1.32 U1.49 X1.2 X1.4 | length 14.9
  Top Layer w0.254: R2.2@28.112,8.337 R2.2 ; C18.1 C18.1@36.937,16.698 ; C19.2 C19.2@40.012,16.597 ; v1@40.012,15.988 v1(40.025,15.975) ; FL1.2 41.758,17.25 41.762,17.246 41.762,16.663 v1(41.775,16.65) ; FL1.4 41.758,17.704 41.762,17.708 41.762,18.212 v1(41.775,18.225)
  Top Layer w0.3: C16.1@28.038,9.488 C16.1@28.05,9.5 ; U1.49@28.425,17 v4(29.175,16.25)
  Top Layer w0.5: v1(36.925,16) C18.1@36.925,16.688 ; v1@40.012,15.988 C19.2@40.012,16.597
  Top Layer w0.508: B1.2 8.996,17.796 9.593,17.796 10.1,18.303 10.1,19.975 v4(10.075,20) ; C4.2@22.054,18.646 22.1,18.6 C4.2 ; SW1.1@31.25,6 SW1.1@31.263,5.988 ; SW1.1@35.8,5.975 SW1.1@35.825,6 ; C8.2 35.95,16.541 35.962,16.529 35.962,15.263 C3.2 ; v4(44.43,14.508) 44.434,14.504 45.396,14.504 v4(45.4,14.5) ; v4(44.475,20.175) 44.479,20.171 45.441,20.171 v4(45.445,20.167) ; J3.2 45.4,15.85 v4(45.4,14.5) ; J3.3 45.445,18.945 v4(45.445,20.167) ; v4(46.35,14.5) v4(45.4,14.5) ; v4(46.395,20.167) v4(45.445,20.167)
  other v1: 44.45,1.825 10.15,2 45.525,2.35 43.225,2.4 8.95,2.475 11.35,2.475 42.75,3.425 46.05,3.45 8.55,3.6 11.75,3.6 43.125,4.525 45.6,4.525 8.925,4.725 11.35,4.725 44.4,5.15 10.15,5.2 30.325,5.325 36.65,6.025 38.6,7.15 23.95,8.775 25.5,8.875 28.25,8.975 30.675,9.325 30.1,9.95 23.95,11.175 5.825,11.325 23.25,11.525 24.65,11.55 37.425,12.275 35.85,18.275 21.775,19.425 35.85,22.5 34.825,24.35 10.075,25.075 44.375,25.075 8.875,25.55 11.275,25.55 43.175,25.55 45.575,25.55 8.475,26.675 11.675,26.675 42.775,26.675 45.975,26.675 8.85,27.8 11.275,27.8 43.15,27.8 45.575,27.8 10.075,28.275 44.375,28.275
  other v2: 3.325,1.675 5.325,1.675 1.625,14.175 1.625,16.175 1.625,18.175 1.625,20.175 1.625,23.6 1.625,25.6 1.625,27.6 3.775,28.475 5.775,28.475 7.775,28.475 13,28.475 15,28.475 17,28.475 19,28.475 21,28.475 23,28.475 25,28.475 27,28.475 29,28.475 31,28.475 33,28.475 35,28.475 37,28.475 39,28.475 41,28.475
  other v3: 13.05,1.625 15.05,1.625 17.05,1.625 19.05,1.625 21.05,1.625 23.05,1.625 25.05,1.625 27.05,1.625 29.05,1.625 31.05,1.625 33.05,1.625 35.05,1.625 37.05,1.625 39.05,1.625 41.05,1.625 7.3,1.675 1.625,3.925 1.625,5.925 46.325,7.225 1.625,7.925 46.325,9.3 1.625,9.925 46.325,11.3 1.625,11.925 46.325,13.3 46.325,21.8 46.325,23.8
  other v4: 27.425,14.4 29.175,14.4 30.875,14.4 27.425,16.25 30.95,16.25 27.425,17.975 29.175,17.975 30.925,17.975
  other v5: 5.925,23.5 18.9,23.6 21.675,23.6 24.25,24.175 18.425,24.325 19.3,24.325 21.2,24.325 22.075,24.325 23.775,24.9 24.65,24.9
HSE_IN: U1.25 X1.1 | length 4
  Top Layer w0.152: U1.25 31.925,21.073 cw(c34.465,21.073) 32.669,22.869 X1.1
HSE_OUT: U1.24 X1.3 | length 3.1
  Top Layer w0.152: U1.24 32.749,19.074 34.476,20.376 X1.3
LSE_IN: C17.2 U1.2 Y1.2 | length 4.8
  Top Layer w0.152: C17.2 24.1,9.75 24.926,9.75 25.072,9.896 25.072,10.122 Y1.2 25.911,11.317 25.916,11.324 26.851,12.462 26.851,12.676 U1.2
LSE_OUT: C16.2 U1.3 Y1.1 | length 4.2
  Top Layer w0.152: U1.3 27.38,12.676 26.983,10.917 26.974,10.899 Y1.1 26.95,10.55 C16.2
NetB1_1: B1.1 J2.A7 J2.B7 | length 5.2
  Top Layer w0.152: J2.A7 6.129,17.256 cw(c6.129,18.004) 5.6,17.475 5.6,18.052 cw(c6.093,17.559) 6.093,18.256 J2.B7 7.486,18.256 ccw(c7.486,19.454) 8.045,18.394 ccw(c7.486,19.454) 8.313,18.588 cw(c8.418,18.477) B1.1@8.361,18.618 ; B1.1@8.361,18.618 cw(c8.801,17.478) 8.426,18.641 B1.1
NetB1_3: B1.3 J2.A6 J2.B6 | length 4.3
  Top Layer w0.152: J2.B6 7.198,16.756 7.367,16.756 ccw(c7.367,17.255) 7.72,16.902 ccw(c7.587,17.035) 7.775,17.035 7.775,17.334 ccw(c7.434,17.334) 7.675,17.575 ; J2.A6 7.238,17.756 cw(c7.238,17.138) 7.675,17.575 ; B1.3 8.426,16.92 cw(c8.95,18.007) 8.098,17.152 8.058,17.192 7.675,17.575
NetD1_A: D1.A U1.16 | length 5.1
  Top Layer w0.152: U1.16 33.45,15 35.476,12.974 35.476,12.174 35.8,11.85 D1.A
NetD1_K: D1.K R5.2 | length 1.6
  Top Layer w0.254: D1.K 37.125,10.35 37.375,10.6 R5.2
NetFL1_3: FL1.3 J3.1 | length 1.5
  Top Layer w0.152: FL1.3 42.363,17.463 42.424,17.402 43.798,17.402 J3.1
NetJ2_A5: J2.A5 R7.2 | length 6.7
  Top Layer w0.254: R7.2 4.123,19.802 5.169,18.756 J2.A5
NetJ2_B5: J2.B5 R6.2 | length 6.5
  Top Layer w0.254: R6.2 4.1,11.323 4.1,14.85 5.006,15.756 J2.B5
NetP1_2: P1.2 R3.1 | length 31.8
  Top Layer w0.152: v1(32.5,9.625) R3.1
  Bottom Layer w0.152: P1.2 5.05,7.1 5.45,7.5 31.825,7.5 32.5,8.175 v1(32.5,9.625)
NetP1_3: P1.3 R4.1 | length 33.7
  Top Layer w0.152: v1(33.85,9.625) R4.1
  Bottom Layer w0.152: P1.3 5.08,5.83 6.1,6.85 32.6,6.85 33.85,8.1 v1(33.85,9.625)
NetR1_2: R1.2 SW2.1 | length 6.1
  Top Layer w0.152: SW2.1@22.125,6 26.625,6 28.225,6 R1.2
NRST: C1.1 P4.2 SW1.2 U1.7 | length 30.2
  Top Layer w0.152: U1.7 29.425,12.373 29.426,12.371 29.426,11.967 29.425,11.966 29.425,9.4 30.382,8.443 30.382,8.193 v1(30.425,8.15) 31.135,8.15 31.25,8.15 35.75,8.15 C1.1
  Bottom Layer w0.152: P4.2 15.105,9.37 16.325,8.15 v1(30.425,8.15)
PA0: P2.8 U1.9 | length 1.3
  Top Layer w0.152: U1.9 30.445,12.855 30.445,12.036 30.675,11.806 v1(30.675,11.725)
PA1: P2.9 U1.10 | length 11.8
  Top Layer w0.152: U1.10 30.999,12.801 30.999,12.186 31.4,11.785 v1(31.4,11.75)
  Bottom Layer w0.254: v1@31.407,11.75 32.968,11.75 34.725,9.993 34.725,3.8 P2.9
PA4: P2.10 U1.13 | length 11.9
  Top Layer w0.152: U1.13 32.55,13.106 32.83,12.825 v1(32.83,12.755)
  Bottom Layer w0.254: v1(32.83,12.755) 37.44,8.145 P2.10
PA5: P3.9 U1.14 | length 20.2
  Top Layer w0.152: U1.14 32.624,13.926 32.939,13.926 33.218,13.648 33.218,13.418 v1(33.275,13.361)
  Bottom Layer w0.254: v1(33.275,13.361) 33.286,13.361 33.697,12.95 35.925,12.95 39.075,16.1 39.075,21.775 35.585,25.265 P3.9
PA6: P3.8 U1.15 | length 17.8
  Top Layer w0.152: U1.15 32.624,14.426 33.215,14.426 33.844,13.797 v1(33.844,13.775)
  Bottom Layer w0.254: P3.8 33.1,26.445 33.1,24.125 36.602,20.623 36.602,17.875 36.373,17.646 36.373,14.898 35.264,13.789 33.858,13.789 v1(33.844,13.775)
PA8: P3.7 U1.17 | length 17.5
  Top Layer w0.152: U1.17 32.624,15.426 33.664,15.426 34.466,14.624 34.704,14.624 34.932,14.395 v1(35.013,14.395)
  Bottom Layer w0.254: P3.7 30.505,24.42 34.85,20.075 34.85,18 35.75,17.1 35.75,15.132 v1(35.013,14.395)
PA9: P3.6 U1.18 | length 15.7
  Top Layer w0.152: U1.18 32.568,15.982 33.054,15.982 33.203,15.833 33.962,15.833 34.119,15.675 v1(34.2,15.675)
  Bottom Layer w0.254: P3.6 27.95,26.485 27.95,25.075 28.425,24.6 29.35,24.6 34.183,19.767 34.183,15.692 v1(34.2,15.675)
PA10: P3.1 U1.36 | length 16.3
  Top Layer w0.254: v1(25.844,19.731) 25.863,19.712 26.402,19.712 26.402,19.648 U1.36
  Bottom Layer w0.254: P3.1 15.265,23.335 17.225,21.375 24.9,21.375 25.844,20.431 v1(25.844,19.731)
PA15: P2.1 U1.42 | length 21.5
  Top Layer w0.152: P2.1 14.58,8.959 15.451,9.83 v1(16.501,9.83) ; v1(22.75,16.375) 22.807,16.432 25.732,16.432 U1.42
  Bottom Layer w0.152: v1(16.501,9.83) 19.38,9.83 21.037,11.487 21.037,12.37 22.75,14.084 v1(22.75,16.375)
PB0: P3.4 U1.28 | length 13.6
  Top Layer w0.152: U1.28 30.445,19.645 30.445,20.037 31.308,20.9 v1(31.35,20.9)
  Bottom Layer w0.254: P3.4 22.885,24.515 23.975,23.425 28.807,23.425 31.332,20.9 v1(31.35,20.9)
PB1: P3.3 U1.29 | length 15.8
  Top Layer w0.152: U1.29 29.925,20.415 30.45,20.94 v1@30.45,20.95
  Bottom Layer w0.254: P3.3 20.345,23.405 20.925,22.825 28.582,22.825 30.45,20.957 v1(30.45,20.925)
PB2: P3.5 U1.19 | length 16
  Top Layer w0.152: U1.19 32.622,16.428 32.638,16.444 33.394,16.444 v1(33.45,16.388)
  Bottom Layer w0.254: P3.5 25.425,24.95 26.3,24.075 29.083,24.075 33.45,19.708 v1(33.45,16.388)
PB4: P2.2 U1.44 | length 17.6
  Top Layer w0.152: P2.2 18.475,4.98 18.475,10.1 19.45,11.075 19.45,12.85 22.1,15.5 U1.44
PB5: P2.3 U1.45 | length 16.4
  Top Layer w0.152: P2.3 19.66,4.106 19.175,4.591 19.175,10.25 19.95,11.025 19.95,12.7 22.25,15 U1.45
PB6: P2.4 U1.46 | length 16.7
  Top Layer w0.152: P2.4 21.824,4.001 21.299,4.001 19.75,5.55 19.75,10.024 20.448,10.721 20.448,12.573 22.375,14.5 U1.46
PB7: P2.5 U1.47 | length 18.1
  Top Layer w0.152: v1(20.75,5.925) 21.025,6.2 21.025,12.525 22.5,14 U1.47
  Bottom Layer w0.152: v1(20.75,5.925) 24.075,5.925 24.8,5.2 24.8,3.685 P2.5
PB8: P2.6 U1.5 | length 1.2
  Top Layer w0.152: v1@28.369,11.781 v1(28.4,11.75) 28.412,11.762 28.412,12.862 U1.5
PB9: P2.7 U1.6 | length 0.7
  Top Layer w0.152: v1(28.925,12.175) U1.6
PE4: P3.2 U1.30 | length 17.9
  Top Layer w0.152: U1.30 29.425,20.644 29.625,20.844 v1(29.625,20.925)
  Bottom Layer w0.254: P3.2@17.65,26.65 17.65,23 18.5,22.15 28.4,22.15 v1(29.625,20.925)
RF1: C18.2 L3.2 U1.21 | length 5.5
  Top Layer w0.152: U1.21 36.915,17.5 C18.2 38.031,17.49 L3.2
RF_Match: C19.1 FL1.1 L3.1 | length 2.3
  Top Layer w0.152: L3.1 39.985,17.475 C19.1 41.125,17.49 FL1.1
SMPSFB: C15.1 L2.1 U1.31
SMPSLX: L1.2 U1.33 | length 1.5
  Top Layer w0.254: L1.2 L1.2@27.925,20.975
  Top Layer w0.3: U1.33 27.925,20.325
  Top Layer w0.5: 27.925,20.325 L1.2@27.925,20.975
SMPSLXL: L1.1 L2.2 | length 1.7
  Top Layer w0.254: L1.1 29.275,22.85 29.35,22.775 L2.2
SWCLK: P4.1 U1.41 | length 10.7
  Top Layer w0.152: P4.1 17.645,11.911 21.75,16.016 21.75,16.5 22.25,17 U1.41
SWDIO: P4.3 U1.39 | length 11.8
  Top Layer w0.152: v1(23.5,18.125) 23.506,18.125 23.631,18 U1.39
  Bottom Layer w0.152: P4.3 18.905,14.305 19.5,14.9 19.5,17.9 20.03,18.43 23.164,18.43 23.469,18.125 v1(23.5,18.125)
SWO: U1.43
UART_RX: R4.2 U1.12 | length 2.8
  Top Layer w0.152: U1.12 31.999,12.801 31.999,12.551 32.55,12 33.15,12 33.576,11.574 33.576,11.524 33.8,11.3 R4.2
UART_TX: R3.2 U1.11 | length 2
  Top Layer w0.152: U1.11 31.499,12.801 31.499,12.486 32.245,11.739 32.245,11.524 32.469,11.3 R3.2
USB_D_N: B1.6 U1.37 | length 18.1
  Top Layer w0.152: B1.6 11.974,18.924 12.277,19.311 ccw(c11.45,19.958) 12.5,19.958 12.5,20.425 cw(c13.856,20.425) 13.856,21.781 21.718,21.781 cw(c21.718,21) 22.5,21 22.5,20.95 ccw(c24.45,20.95) 24.45,19 U1.37 U1.37@25.601,18.98
USB_D_P: B1.4 U1.38 | length 19.6
  Top Layer w0.152: B1.4 ccw(c11.45,18.256) 12.906,18.256 12.906,20.425 cw(c13.856,20.425) 13.856,21.375 21.669,21.375 cw(c21.669,20.95) 22.094,20.95 ccw(c24.544,20.95) 24.544,18.5 U1.38 ccw(c25.781,18.5) U1.38@25.781,18.519
pads on no net: FID1.1 FID2.1 FID3.1 IC1.4 J2.A8 J2.B8 J2.MH P4.4 U1.26 U1.27

## Polygon pours and split planes (outlines as drawn)
GND on Top Layer "GND_L01_P-001" (solid, remove dead copper, pour order 14): 0.65,27 0.65,3.275 ccw(c2.95,3.275) 2.95,0.975 45.35,0.975 ccw(c45.35,2.85) 47.225,2.85 47.225,27.275 ccw(c45.125,27.275) 45.125,29.375 3.025,29.375 ccw(c3.025,27)
+3V3 on Top Layer "GND_L01_P-001" (solid, remove dead copper, pour order 13): 11.075,12.475 12.75,12.475 13.1,12.125 13.1,9.825 12.775,9.5 10.85,9.5 10.85,10.875 11.075,11.1
+3V3 on Top Layer "GND_L01_P-001" (solid, remove dead copper, pour order 15): 23.025,21.525 23.025,20.6 23.4,20.225 26.775,20.225 26.775,19.35 27.575,19.35 27.575,19.9 27.125,19.9 27.125,20.35 26.7,20.775 26.7,21.525
SMPSFB on Top Layer "SMPSFB_L01_P003" (solid, pour order 3): 31.45,21.5 31.45,22.125 28.775,22.125 28.775,20.4 28.775,19.35 29.075,19.35 29.075,21.05 29.525,21.5
+3V3 on Top Layer "+3V3_L01_P009" (solid, pour order 9): 26.275,12.6 26.575,12.6 26.575,13.15 26.1,13.15 26.075,13.175 26.075,13.6 22.45,13.6 21.85,13 21.85,12.1 22.4,12.1 22.4,12.625 22.575,12.8 26.275,12.8
GND on Bottom Layer "GND_L01_P-001" (solid, remove dead copper, pour order 10): 1.95,29.375 ccw(c2.218,28.032) 0.875,28.3 0.875,2.1 ccw(c2,2.1) 2,0.975 45.898,0.975 ccw(c45.9,2.175) 47.1,2.175 47.1,28.325 ccw(c46.05,28.325) 46.05,29.375
+3V3 on Int1 (GND) (split plane): 45.441,29.058 45.605,29.034 45.766,28.994 45.922,28.938 46.072,28.867 46.215,28.781 46.348,28.683 46.471,28.571 46.583,28.448 46.681,28.315 46.767,28.172 46.838,28.022 46.894,27.866 46.934,27.705 46.958,27.541 46.966,27.388 46.965,27.375 46.965,2.825 46.966,2.812 46.959,2.664 46.935,2.505 46.896,2.349 46.841,2.197 46.773,2.051 46.69,1.913 46.594,1.784 46.486,1.664 46.366,1.556 46.237,1.46 46.099,1.377 45.953,1.309 45.801,1.254 45.645,1.215 45.486,1.191 45.338,1.184 45.325,1.185 2.675,1.185 2.662,1.184 2.514,1.191 2.355,1.215 2.199,1.254 2.047,1.309 1.901,1.377 1.763,1.46 1.634,1.556 1.514,1.664 1.406,1.784 1.31,1.913 1.227,2.051 1.159,2.197 1.104,2.348 1.065,2.505 1.041,2.664 1.034,2.812 1.035,2.825 1.035,27.425 1.034,27.438 1.041,27.586 1.065,27.745 1.104,27.901 1.159,28.053 1.227,28.199 1.31,28.337 1.406,28.466 1.514,28.586 1.634,28.694 1.763,28.79 1.901,28.873 2.047,28.941 2.198,28.996 2.355,29.035 2.514,29.059 2.662,29.066 2.675,29.065 45.275,29.065 45.288,29.066
GND on Int2 (PWR) (split plane): 45.441,29.058 45.605,29.034 45.766,28.994 45.922,28.938 46.072,28.867 46.215,28.781 46.348,28.683 46.471,28.571 46.583,28.448 46.681,28.315 46.767,28.172 46.838,28.022 46.894,27.866 46.934,27.705 46.958,27.541 46.966,27.388 46.965,27.375 46.965,2.825 46.966,2.812 46.959,2.664 46.935,2.505 46.896,2.349 46.841,2.197 46.773,2.051 46.69,1.913 46.594,1.784 46.486,1.664 46.366,1.556 46.237,1.46 46.099,1.377 45.953,1.309 45.801,1.254 45.645,1.215 45.486,1.191 45.338,1.184 45.325,1.185 2.675,1.185 2.662,1.184 2.514,1.191 2.355,1.215 2.199,1.254 2.047,1.309 1.901,1.377 1.763,1.46 1.634,1.556 1.514,1.664 1.406,1.784 1.31,1.913 1.227,2.051 1.159,2.197 1.104,2.348 1.065,2.505 1.041,2.664 1.034,2.812 1.035,2.825 1.035,27.425 1.034,27.438 1.041,27.586 1.065,27.745 1.104,27.901 1.159,28.053 1.227,28.199 1.31,28.337 1.406,28.466 1.514,28.586 1.634,28.694 1.763,28.79 1.901,28.873 2.047,28.941 2.198,28.996 2.355,29.035 2.514,29.059 2.662,29.066 2.675,29.065 45.275,29.065 45.288,29.066

## Keep-outs
Keep-Out Layer:
  lines w0.2: -0.025,0.229 ccw(c0.229,0.229) 0.229,-0.025 47.771,-0.025 ccw(c47.771,0.229) 48.025,0.229 48.025,29.746 ccw(c47.771,29.746) 47.771,30 0.229,30 ccw(c0.229,29.746) -0.025,29.746 -0.025,0.229

## Other copper
Top Layer:
  pour cut-out: 27.031,22.186 28.775,22.186 28.775,21.704 26.929,21.704 26.891,21.704 26.891,22.186
  pour cut-out: 36.9,15.475 36.425,15.95 36.425,18.3 37,18.875 43.6,18.875 43.6,20.8 46.95,20.8 46.95,13.925 43.7,13.925 43.7,15.475 42.975,15.475
Bottom Layer:
  text "ING. RAY GUZMAN" at 42.885,14.296 h1 r90

## Silkscreen, mask and mechanical layers (free items; w line width, h text height)
Top Overlay:
  lines w0.2: 34.625,9 40.575,9 40.575,13.725 34.625,13.725 34.625,9
  text "STATUS" at 40.575,9 h1 r90
  text "+3V3" at 4.875,8.185 h0.8
  text "RXD" at 4.875,6.875 h0.8
  text "TXD" at 4.875,5.625 h0.8
  text "GND" at 4.875,4.26 h0.8
Bottom Overlay:
  text "PA10" at 15.61,24.621 h1 r90
  text "PE4" at 18.171,24.621 h1 r90
  text "PB1" at 20.671,24.596 h1 r90
  text "PB0" at 23.21,24.571 h1 r90
  text "PB2" at 25.771,24.546 h1 r90
  text "PA9" at 28.285,24.521 h1 r90
  text "PA8" at 30.785,24.521 h1 r90
  text "GND" at 38.435,24.521 h1 r90
  text "PA6" at 33.36,24.496 h1 r90
  text "PA5" at 35.885,24.496 h1 r90
  text "PA15" at 14.935,7.671 h1 r90
  text "PB7" at 25.046,7.171 h1 r90
  text "PB8" at 27.61,7.171 h1 r90
  text "PB4" at 17.446,7.146 h1 r90
  text "PB5" at 19.81,7.146 h1 r90
  text "PB6" at 22.485,7.146 h1 r90
  text "PB9" at 30.16,7.146 h1 r90
  text "PA0" at 32.685,7.146 h1 r90
  text "PA4" at 37.721,7.096 h1 r90
  text "PA1" at 35.196,6.996 h1 r90

## Text inside footprints (layer, text, board x,y; h text height)
D1: Mechanical 13 "+" at 35.8,11.909 h0.7 r90